# Altium PCB PCB1.PcbDoc
Units mil, origin at the board's own origin, x right, y up, seen from the top; angles counter-clockwise.
Board outline 643 x 2579 mil, 2 copper layers (Top Layer, Bottom Layer), stack 60.4 mil thick; 2 components, 80 nets, 168 pads, 0 vias.
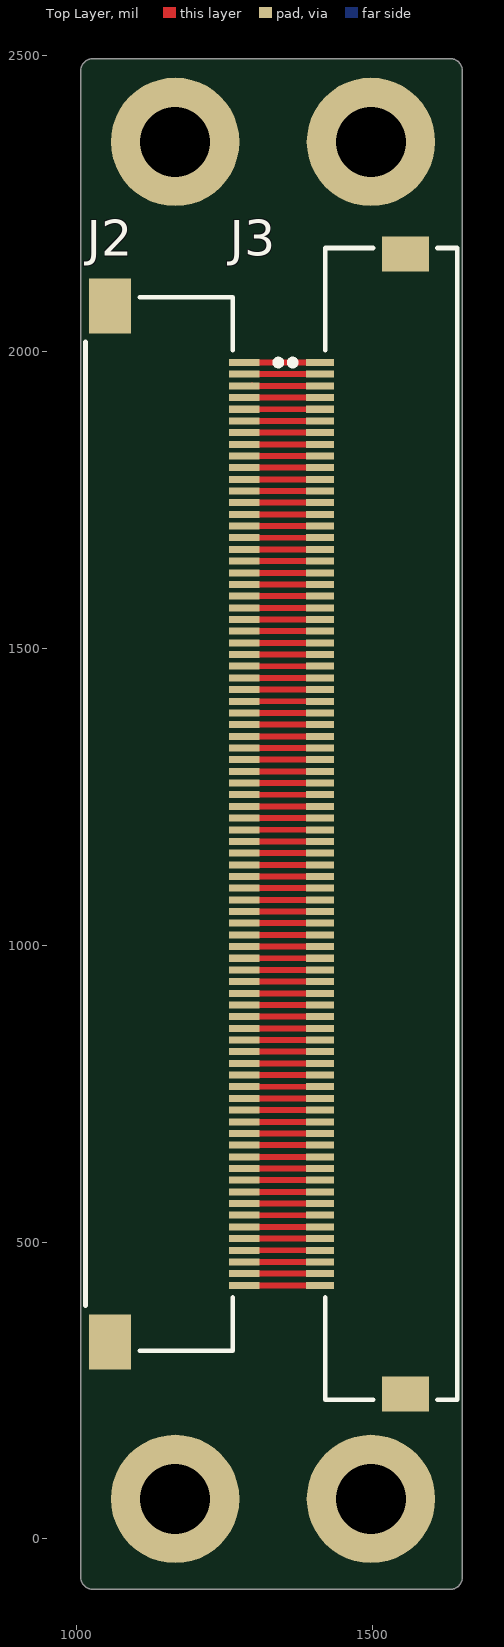
[diagram p0: Top Layer view]
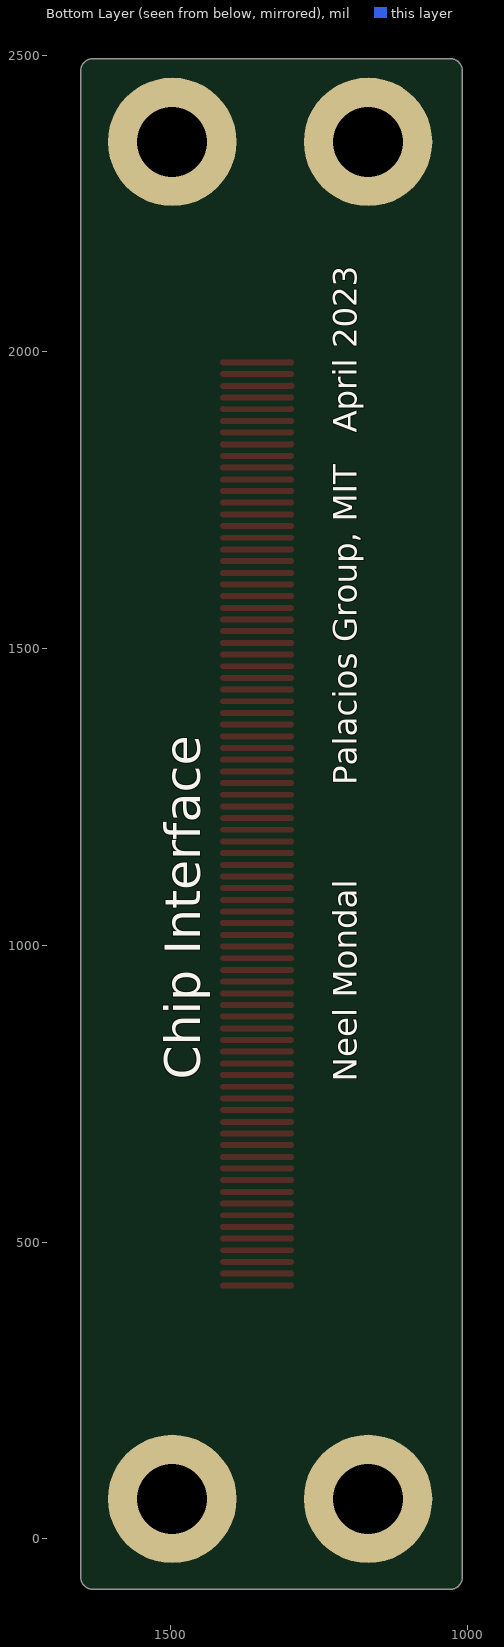
[diagram p1: Bottom Layer view, seen from below]

## Layer stack, top to bottom
Top Solder: solder mask 0.5, Solder Resist, Dk 3.3
Top Layer: signal copper 0.7
Dielectric1: core 59, FR-4, Dk 4.3
Bottom Layer: signal copper 0.7
Bottom Solder: solder mask 0.5, Solder Resist, Dk 3.3

## Board outline
1008,-65 1008,2474 cw(c1028,2474) 1028,2494 1631,2494 cw(c1631,2474) 1651,2474 1651,-65 cw(c1631,-65) 1631,-85 1028,-85 cw(c1028,-65)

## Design rules (kind name [scope] priority, off if disabled: settings)
Clearance [All] p1: gap=6 ignorepadtopadclearanceinfootprint=FALSE
DiffPairsRouting [All] p1: maxlimit=10 minlimit=10 mostfreqgap=10 toplayer_minwidth=10 toplayer_maxwidth=10 toplayer_prefwidth=10 bottomlayer_minwidth=10 bottomlayer_maxwidth=10 bottomlayer_prefwidth=10 maxuncoupledlength=500
HoleSize [All] p1: absolutevalues=TRUE maxlimit=300 minlimit=10 maxpercent=80.000 minpercent=20.000
MinimumAnnularRing [All] p1: minimumring=10
MinimumSolderMaskSliver [All] p1: minsoldermaskwidth=7
PasteMaskExpansion [All] p1: expansion=10
PlaneClearance [All] p1: clearance=15
PlaneConnect [All] p1: pad.planeconnectstyle=Relief pad.reliefexpansion=20 pad.reliefentries=4 pad.reliefconductorwidth=10 pad.reliefairgap=10 via.planeconnectstyle=Direct via.reliefexpansion=20 via.reliefentries=4 via.reliefconductorwidth=10 via.reliefairgap=10
PolygonConnect [All] p1: thpad.connectstyle=Relief thpad.reliefconductorwidth=10 thpad.reliefentries=4 thpad.polygonreliefangle="90 Angle" thpad.airgapwidth=10 smdpad.connectstyle=Relief smdpad.reliefconductorwidth=10 smdpad.reliefentries=4 smdpad.polygonreliefangle="90 Angle" smdpad.airgapwidth=10 via.connectstyle=Direct via.reliefconductorwidth=10 via.reliefentries=4 via.polygonreliefangle="90 Angle" via.airgapwidth=10
RoutingVias [All] p1: holewidth=10 width=20 viastyle="Through Hole" minholewidth=10 minwidth=20 maxholewidth=10 maxwidth=20
SMDNeckDown [All] p1: percent=100.000
SilkToSolderMaskClearance SilkscreenOverComponentPads [IsPad] p1: minsilkscreentomaskgap=10 clearancetoexposedcopper=TRUE
SolderMaskExpansion [All] p1: expansion=10 istentingtop=FALSE
Width [All] p1: maxlimit=10 minlimit=10 preferedwidth=10
23 further rules are at their usual default settings.

## Components (designator, comment, footprint, x,y, rotation, side; value= is the part's Value field where it differs from the comment)
J2 "FH28H-80S-0.5SH(05)" FP-FH28H-80S-0_5SH_05-MFG 1140,1204.63 r90 top locked
J3 "200485-0480" FP-200485-0480-MFG 1531.18,1204.63 r90 top locked

## Footprints (in the part's own frame and the unit in brackets; to place one, negate y for a bottom-side part, rotate by r counter-clockwise, add the part's x,y. Pads: shape width x height; smd on the part's side, far side on the other; paste and mask are expansions set on the pad)
FP-200485-0480-MFG [mm]
  rect 0.3x1.2 smd paste-1000 mask+0: 1(19.75,3.045) 2(19.25,3.045) 3(18.75,3.045) 4(18.25,3.045) 5(17.75,3.045) 6(17.25,3.045) 7(16.75,3.045) 8(16.25,3.045) 9(15.75,3.045) 10(15.25,3.045) 11(14.75,3.045) 12(14.25,3.045) 13(13.75,3.045) 14(13.25,3.045) 15(12.75,3.045) 16(12.25,3.045) 17(11.75,3.045) 18(11.25,3.045) 19(10.75,3.045) 20(10.25,3.045) 21(9.75,3.045) 22(9.25,3.045) 23(8.75,3.045) 24(8.25,3.045) 25(7.75,3.045) 26(7.25,3.045) 27(6.75,3.045) 28(6.25,3.045) 29(5.75,3.045) 30(5.25,3.045) 31(4.75,3.045) 32(4.25,3.045) 33(3.75,3.045) 34(3.25,3.045) 35(2.75,3.045) 36(2.25,3.045) 37(1.75,3.045) 38(1.25,3.045) 39(0.75,3.045) 40(0.25,3.045) 41(-0.25,3.045) 42(-0.75,3.045) 43(-1.25,3.045) 44(-1.75,3.045) 45(-2.25,3.045) 46(-2.75,3.045) 47(-3.25,3.045) 48(-3.75,3.045) 49(-4.25,3.045) 50(-4.75,3.045) 51(-5.25,3.045) 52(-5.75,3.045) 53(-6.25,3.045) 54(-6.75,3.045) 55(-7.25,3.045) 56(-7.75,3.045) 57(-8.25,3.045) 58(-8.75,3.045) 59(-9.25,3.045) 60(-9.75,3.045) 61(-10.25,3.045) 62(-10.75,3.045) 63(-11.25,3.045) 64(-11.75,3.045) 65(-12.25,3.045) 66(-12.75,3.045) 67(-13.25,3.045) 68(-13.75,3.045) 69(-14.25,3.045) 70(-14.75,3.045) 71(-15.25,3.045) 72(-15.75,3.045) 73(-16.25,3.045) 74(-16.75,3.045) 75(-17.25,3.045) 76(-17.75,3.045) 77(-18.25,3.045) 78(-18.75,3.045) 79(-19.25,3.045) 80(-19.75,3.045)
  rect 1.5x2 smd paste+0 mask+0: 81(-24.4,-0.605) 82(24.4,-0.605)
  silkscreen extent -24.65,-2.82 24.65,4.34, body extent -25.25,-2.93 25.25,3.74, height 0.25
FP-FH28H-80S-0_5SH_05-MFG [mm]
  rect 0.3x1.3 smd paste-1000 mask+0: 1(19.75,-3.65) 2(19.25,-3.65) 3(18.75,-3.65) 4(18.25,-3.65) 5(17.75,-3.65) 6(17.25,-3.65) 7(16.75,-3.65) 8(16.25,-3.65) 9(15.75,-3.65) 10(15.25,-3.65) 11(14.75,-3.65) 12(14.25,-3.65) 13(13.75,-3.65) 14(13.25,-3.65) 15(12.75,-3.65) 16(12.25,-3.65) 17(11.75,-3.65) 18(11.25,-3.65) 19(10.75,-3.65) 20(10.25,-3.65) 21(9.75,-3.65) 22(9.25,-3.65) 23(8.75,-3.65) 24(8.25,-3.65) 25(7.75,-3.65) 26(7.25,-3.65) 27(6.75,-3.65) 28(6.25,-3.65) 29(5.75,-3.65) 30(5.25,-3.65) 31(4.75,-3.65) 32(4.25,-3.65) 33(3.75,-3.65) 34(3.25,-3.65) 35(2.75,-3.65) 36(2.25,-3.65) 37(1.75,-3.65) 38(1.25,-3.65) 39(0.75,-3.65) 40(0.25,-3.65) 41(-0.25,-3.65) 42(-0.75,-3.65) 43(-1.25,-3.65) 44(-1.75,-3.65) 45(-2.25,-3.65) 46(-2.75,-3.65) 47(-3.25,-3.65) 48(-3.75,-3.65) 49(-4.25,-3.65) 50(-4.75,-3.65) 51(-5.25,-3.65) 52(-5.75,-3.65) 53(-6.25,-3.65) 54(-6.75,-3.65) 55(-7.25,-3.65) 56(-7.75,-3.65) 57(-8.25,-3.65) 58(-8.75,-3.65) 59(-9.25,-3.65) 60(-9.75,-3.65) 61(-10.25,-3.65) 62(-10.75,-3.65) 63(-11.25,-3.65) 64(-11.75,-3.65) 65(-12.25,-3.65) 66(-12.75,-3.65) 67(-13.25,-3.65) 68(-13.75,-3.65) 69(-14.25,-3.65) 70(-14.75,-3.65) 71(-15.25,-3.65) 72(-15.75,-3.65) 73(-16.25,-3.65) 74(-16.75,-3.65) 75(-17.25,-3.65) 76(-17.75,-3.65) 77(-18.25,-3.65) 78(-18.75,-3.65) 79(-19.25,-3.65) 80(-19.75,-3.65)
  rect 2.35x1.8 smd paste+0 mask+0: 81(-22.175,2.1) 82(22.175,2.1)
  silkscreen extent -22.55,-5.23 22.55,3.15, body extent -23.45,-4.4 23.45,3.25, height 0.25

## Part data
J2: library part CMP-11609-000031-1, "CONN FFC BOTTOM 80POS 0.50MM R/A", Contact Resistance=50mR, Current Rating=500mA, Flammability Rating="UL94 V-0", Housing Color=Grey, Insulation Resistance=500MR, Max Operating Temperature=85°C, Max Voltage Rating (AC)=50V, Min Operating Temperature=-40°C, Package Quantity=1, Actuator Material=Polymer, Contact Material=Bronze, Contact Plating=Gold, Depth=6.5mm, Gender=Receptacle, Housing Material=Polymer, Lead Pitch=0.5mm, Length=44.9mm, Mating Cycles=20, Max Current Rating=500mA, Mount="Surface Mount", Number of Contacts=80, Number of Positions=80, Number of Rows=1, Orientation="Right Angle", Packaging="Tape and Reel", Pitch=0.5mm, Radiation Hardening=No, REACH SVHC="No SVHC", RoHS Compliant=Yes, Series=FH28, Termination=Solder, Voltage Rating=50V
J3: library part CMP-04775-000024-1, "0.5 ONE-TOUCH RA 80P", System=Connector

## Free pads (board coordinates)
  round 216.54 hole 118.11: 4(1167,67) 4(1167,2354) 4(1497,67) 4(1497,2354)

## Nets (pads, with @x,y where several pads share a name; then routed paths per layer and width w, separated by ;. In a path a pad name is that pad's centre, name@x,y a point inside that pad or via, vN(x,y) a via of type N, cw(c..) or ccw(c..) an arc to the next point about the centre after c; other vN are vias at no path point)
NetJ2_1: J2.1 J3.1 | length 115.4
  Top Layer w10: J2.1@1296.38,1982.19 J3.1 J3.1@1411.13,1982.36 ; J2.1@1296.38,1982.53 J2.1@1296.55,1982.36
NetJ2_2: J2.2 J3.2 | length 115.2
  Top Layer w10: J2.2@1296.38,1962.5 J3.2 ; J2.2@1296.38,1962.84 J2.2@1296.55,1962.67
NetJ2_3: J2.3 J3.3 | length 115.6
  Top Layer w10: J2.3@1296.04,1942.82 1296.21,1942.99 J2.3@1296.38,1943.16 ; J2.3@1296.38,1942.82 J3.3 J3.3@1411.13,1942.99
NetJ2_4: J2.4 J3.4 | length 115.4
  Top Layer w10: J2.4@1296.38,1923.13 J3.4 J3.4@1411.13,1923.3 ; J2.4@1296.38,1923.47 J2.4@1296.55,1923.3
NetJ2_5: J2.5 J3.5 | length 115.4
  Top Layer w10: J2.5@1296.38,1903.45 J3.5 J3.5@1411.13,1903.62 ; J2.5@1296.38,1903.79 J2.5@1296.55,1903.62
NetJ2_6: J2.6 J3.6 | length 115.4
  Top Layer w10: J2.6@1296.38,1883.76 J3.6 J3.6@1411.13,1883.93 ; J2.6@1296.38,1884.1 J2.6@1296.55,1883.93
NetJ2_7: J2.7 J3.7 | length 115.4
  Top Layer w10: J2.7@1296.38,1864.08 J3.7 J3.7@1411.13,1864.25 ; J2.7@1296.38,1864.42 J2.7@1296.55,1864.25
NetJ2_8: J2.8 J3.8 | length 115.4
  Top Layer w10: J2.8@1296.38,1844.39 J3.8 J3.8@1411.13,1844.56 ; J2.8@1296.38,1844.73 J2.8@1296.55,1844.56
NetJ2_9: J2.9 J3.9 | length 115.4
  Top Layer w10: J2.9@1296.38,1824.71 J3.9 J3.9@1411.13,1824.88 ; J2.9@1296.38,1825.05 J2.9@1296.55,1824.88
NetJ2_10: J2.10 J3.10 | length 115.4
  Top Layer w10: J2.10@1296.38,1805.02 J3.10 J3.10@1411.13,1805.19 ; J2.10@1296.38,1805.36 J2.10@1296.55,1805.19
NetJ2_11: J2.11 J3.11 | length 114.9
  Top Layer w10: J2.11@1296.38,1785.34 J3.11
NetJ2_12: J2.12 J3.12 | length 114.9
  Top Layer w10: J2.12@1296.38,1765.65 J3.12
NetJ2_13: J2.13 J3.13 | length 114.9
  Top Layer w10: J2.13@1296.38,1745.97 J3.13
NetJ2_14: J2.14 J3.14 | length 114.9
  Top Layer w10: J2.14@1296.38,1726.28 J3.14
NetJ2_15: J2.15 J3.15 | length 114.9
  Top Layer w10: J2.15@1296.38,1706.6 J3.15
NetJ2_16: J2.16 J3.16 | length 114.9
  Top Layer w10: J2.16@1296.38,1686.91 J3.16
NetJ2_17: J2.17 J3.17 | length 114.9
  Top Layer w10: J2.17@1296.38,1667.23 J3.17
NetJ2_18: J2.18 J3.18 | length 114.9
  Top Layer w10: J2.18@1296.38,1647.54 J3.18
NetJ2_19: J2.19 J3.19 | length 114.9
  Top Layer w10: J2.19@1296.38,1627.86 J3.19
NetJ2_20: J2.20 J3.20 | length 114.9
  Top Layer w10: J2.20@1296.38,1608.17 J3.20
NetJ2_21: J2.21 J3.21 | length 114.9
  Top Layer w10: J2.21@1296.38,1588.49 J3.21
NetJ2_22: J2.22 J3.22 | length 114.9
  Top Layer w10: J2.22@1296.38,1568.8 J3.22
NetJ2_23: J2.23 J3.23 | length 114.9
  Top Layer w10: J2.23@1296.38,1549.12 J3.23
NetJ2_24: J2.24 J3.24 | length 114.9
  Top Layer w10: J2.24@1296.38,1529.43 J3.24
NetJ2_25: J2.25 J3.25 | length 114.9
  Top Layer w10: J2.25@1296.38,1509.75 J3.25
NetJ2_26: J2.26 J3.26 | length 114.9
  Top Layer w10: J2.26@1296.38,1490.06 J3.26
NetJ2_27: J2.27 J3.27 | length 114.9
  Top Layer w10: J2.27@1296.38,1470.38 J3.27
NetJ2_28: J2.28 J3.28 | length 114.9
  Top Layer w10: J2.28@1296.38,1450.69 J3.28
NetJ2_29: J2.29 J3.29 | length 114.9
  Top Layer w10: J2.29@1296.38,1431.01 J3.29
NetJ2_30: J2.30 J3.30 | length 114.9
  Top Layer w10: J2.30@1296.38,1411.32 J3.30
NetJ2_31: J2.31 J3.31 | length 114.9
  Top Layer w10: J2.31@1296.38,1391.64 J3.31
NetJ2_32: J2.32 J3.32 | length 114.9
  Top Layer w10: J2.32@1296.38,1371.95 J3.32
NetJ2_33: J2.33 J3.33 | length 114.9
  Top Layer w10: J2.33@1296.38,1352.27 J3.33
NetJ2_34: J2.34 J3.34 | length 114.9
  Top Layer w10: J2.34@1296.38,1332.58 J3.34
NetJ2_35: J2.35 J3.35 | length 114.9
  Top Layer w10: J2.35@1296.38,1312.9 J3.35
NetJ2_36: J2.36 J3.36 | length 114.9
  Top Layer w10: J2.36@1296.38,1293.21 J3.36
NetJ2_37: J2.37 J3.37 | length 114.9
  Top Layer w10: J2.37@1296.38,1273.53 J3.37
NetJ2_38: J2.38 J3.38 | length 114.9
  Top Layer w10: J2.38@1296.38,1253.84 J3.38
NetJ2_39: J2.39 J3.39 | length 114.9
  Top Layer w10: J2.39@1296.38,1234.16 J3.39
NetJ2_40: J2.40 J3.40 | length 114.9
  Top Layer w10: J2.40@1296.38,1214.47 J3.40
NetJ2_41: J2.41 J3.41 | length 114.9
  Top Layer w10: J2.41@1296.38,1194.79 J3.41
NetJ2_42: J2.42 J3.42 | length 114.9
  Top Layer w10: J2.42@1296.38,1175.1 J3.42
NetJ2_43: J2.43 J3.43 | length 114.9
  Top Layer w10: J2.43@1296.38,1155.42 J3.43
NetJ2_44: J2.44 J3.44 | length 114.9
  Top Layer w10: J2.44@1296.38,1135.73 J3.44
NetJ2_45: J2.45 J3.45 | length 114.9
  Top Layer w10: J2.45@1296.38,1116.05 J3.45
NetJ2_46: J2.46 J3.46 | length 114.9
  Top Layer w10: J2.46@1296.38,1096.36 J3.46
NetJ2_47: J2.47 J3.47 | length 114.9
  Top Layer w10: J2.47@1296.38,1076.68 J3.47
NetJ2_48: J2.48 J3.48 | length 114.9
  Top Layer w10: J2.48@1296.38,1056.99 J3.48
NetJ2_49: J2.49 J3.49 | length 114.9
  Top Layer w10: J2.49@1296.38,1037.31 J3.49
NetJ2_50: J2.50 J3.50 | length 114.9
  Top Layer w10: J2.50@1296.38,1017.62 J3.50
NetJ2_51: J2.51 J3.51 | length 114.9
  Top Layer w10: J2.51@1296.38,997.94 J3.51
NetJ2_52: J2.52 J3.52 | length 114.9
  Top Layer w10: J2.52@1296.38,978.25 J3.52
NetJ2_53: J2.53 J3.53 | length 114.9
  Top Layer w10: J2.53@1296.38,958.57 J3.53
NetJ2_54: J2.54 J3.54 | length 114.9
  Top Layer w10: J2.54@1296.38,938.88 J3.54
NetJ2_55: J2.55 J3.55 | length 114.9
  Top Layer w10: J2.55@1296.38,919.2 J3.55
NetJ2_56: J2.56 J3.56 | length 114.9
  Top Layer w10: J2.56@1296.38,899.51 J3.56
NetJ2_57: J2.57 J3.57 | length 114.9
  Top Layer w10: J2.57@1296.38,879.83 J3.57
NetJ2_58: J2.58 J3.58 | length 114.9
  Top Layer w10: J2.58@1296.38,860.14 J3.58
NetJ2_59: J2.59 J3.59 | length 114.9
  Top Layer w10: J2.59@1296.38,840.46 J3.59
NetJ2_60: J2.60 J3.60 | length 114.9
  Top Layer w10: J2.60@1296.38,820.77 J3.60
NetJ2_61: J2.61 J3.61 | length 114.9
  Top Layer w10: J2.61@1296.38,801.09 J3.61
NetJ2_62: J2.62 J3.62 | length 114.9
  Top Layer w10: J2.62@1296.38,781.4 J3.62
NetJ2_63: J2.63 J3.63 | length 114.9
  Top Layer w10: J2.63@1296.38,761.72 J3.63
NetJ2_64: J2.64 J3.64 | length 114.9
  Top Layer w10: J2.64@1296.38,742.03 J3.64
NetJ2_65: J2.65 J3.65 | length 114.9
  Top Layer w10: J2.65@1296.38,722.35 J3.65
NetJ2_66: J2.66 J3.66 | length 114.9
  Top Layer w10: J2.66@1296.38,702.66 J3.66
NetJ2_67: J2.67 J3.67 | length 114.9
  Top Layer w10: J2.67@1296.38,682.98 J3.67
NetJ2_68: J2.68 J3.68 | length 114.9
  Top Layer w10: J2.68@1296.38,663.29 J3.68
NetJ2_69: J2.69 J3.69 | length 114.9
  Top Layer w10: J2.69@1296.38,643.61 J3.69
NetJ2_70: J2.70 J3.70 | length 114.9
  Top Layer w10: J2.70@1296.38,623.92 J3.70
NetJ2_71: J2.71 J3.71 | length 114.9
  Top Layer w10: J2.71@1296.38,604.24 J3.71
NetJ2_72: J2.72 J3.72 | length 114.9
  Top Layer w10: J2.72@1296.38,584.55 J3.72
NetJ2_73: J2.73 J3.73 | length 114.9
  Top Layer w10: J2.73@1296.38,564.87 J3.73
NetJ2_74: J2.74 J3.74 | length 114.9
  Top Layer w10: J2.74@1296.38,545.18 J3.74
NetJ2_75: J2.75 J3.75 | length 114.9
  Top Layer w10: J2.75@1296.38,525.5 J3.75
NetJ2_76: J2.76 J3.76 | length 114.9
  Top Layer w10: J2.76@1296.38,505.81 J3.76
NetJ2_77: J2.77 J3.77 | length 114.9
  Top Layer w10: J2.77@1296.38,486.13 J3.77
NetJ2_78: J2.78 J3.78 | length 114.9
  Top Layer w10: J2.78@1296.38,466.44 J3.78
NetJ2_79: J2.79 J3.79 | length 114.9
  Top Layer w10: J2.79@1296.38,446.76 J3.79
NetJ2_80: J2.80 J3.80 | length 114.9
  Top Layer w10: J2.80@1296.38,427.07 J3.80
pads on no net: J2.81 J2.82 J3.81 J3.82

## Silkscreen, mask and mechanical layers (free items; w line width, h text height)
Bottom Overlay:
  text "Chip Interface" at 1449.38,773.63 h60 r270
  text "Neel Mondal         Palacios Group, MIT   April 2023" at 1186.34,770.52 h40 r270
Board:
  the board outline again, w5